# Altium PCB AC_Dimmer.PcbDoc
Units mm, origin at the board's own origin, x right, y up, seen from the top; angles counter-clockwise.
Board outline 44.83 x 29.59 mm, 2 copper layers (Top Layer, Bottom Layer); 17 components, 17 nets, 44 pads, 0 vias.
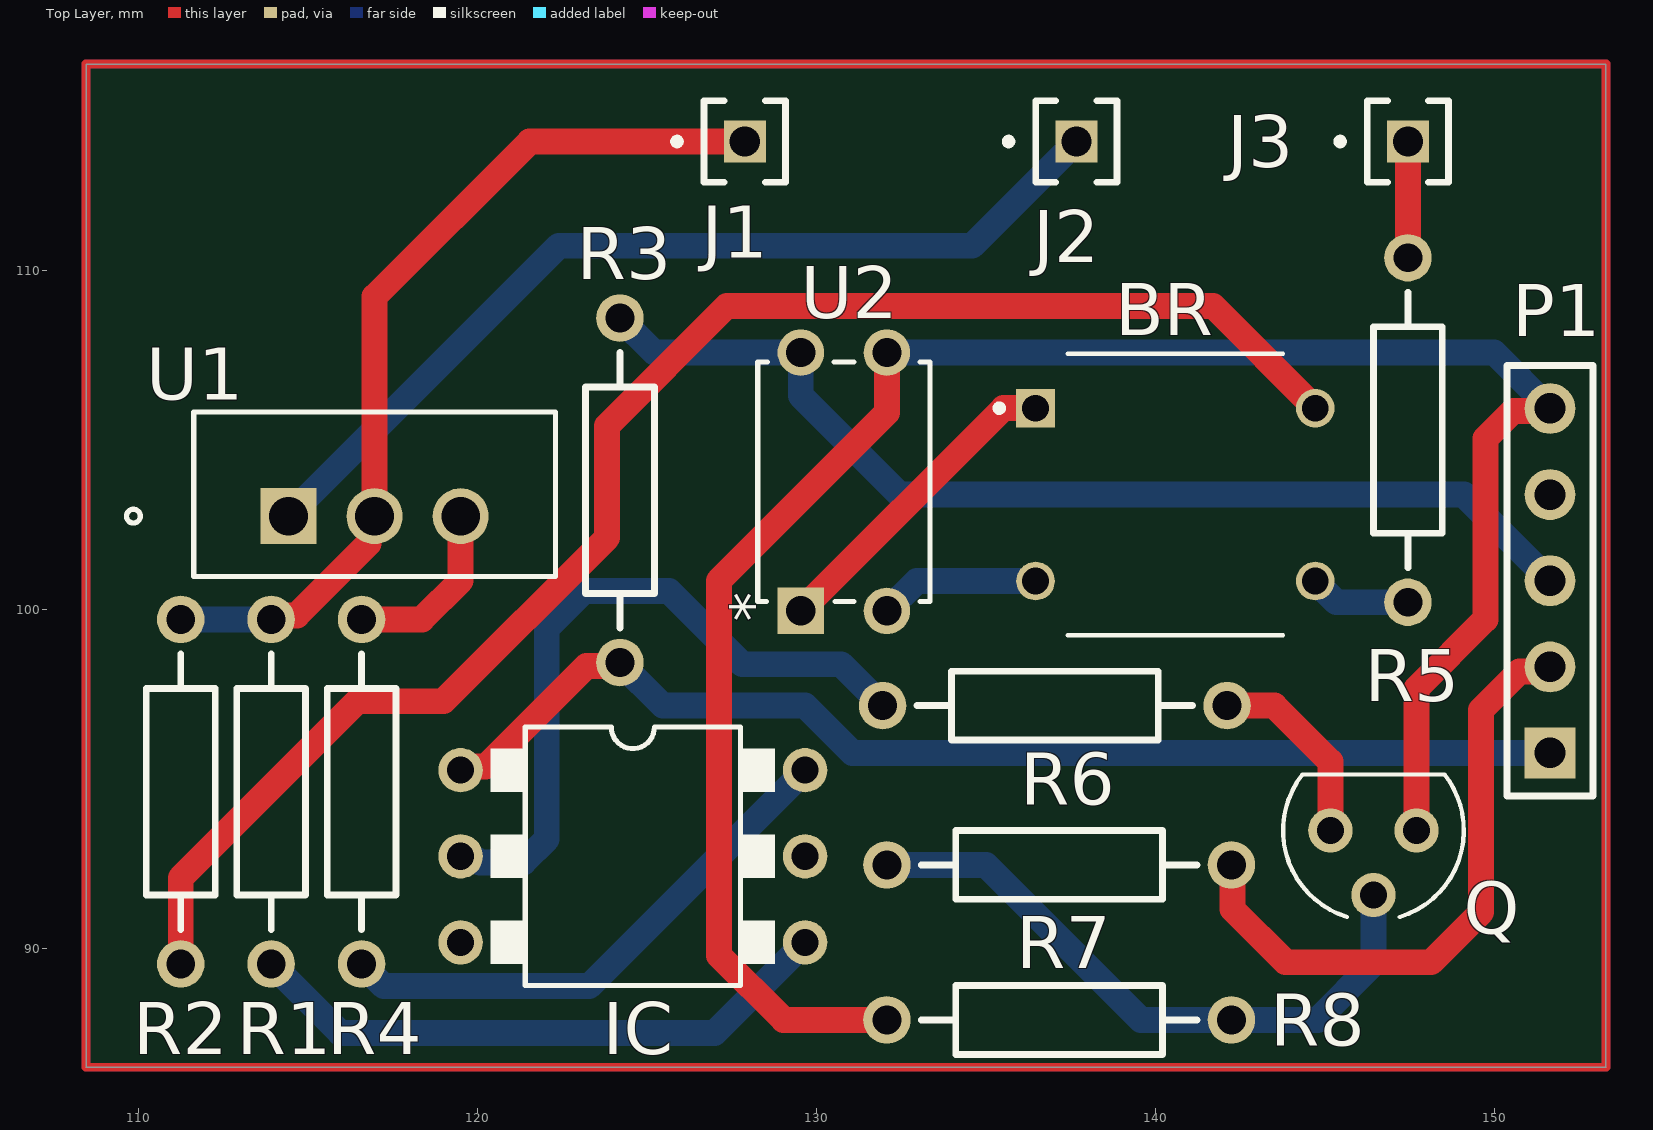
[diagram p0: Top Layer view]
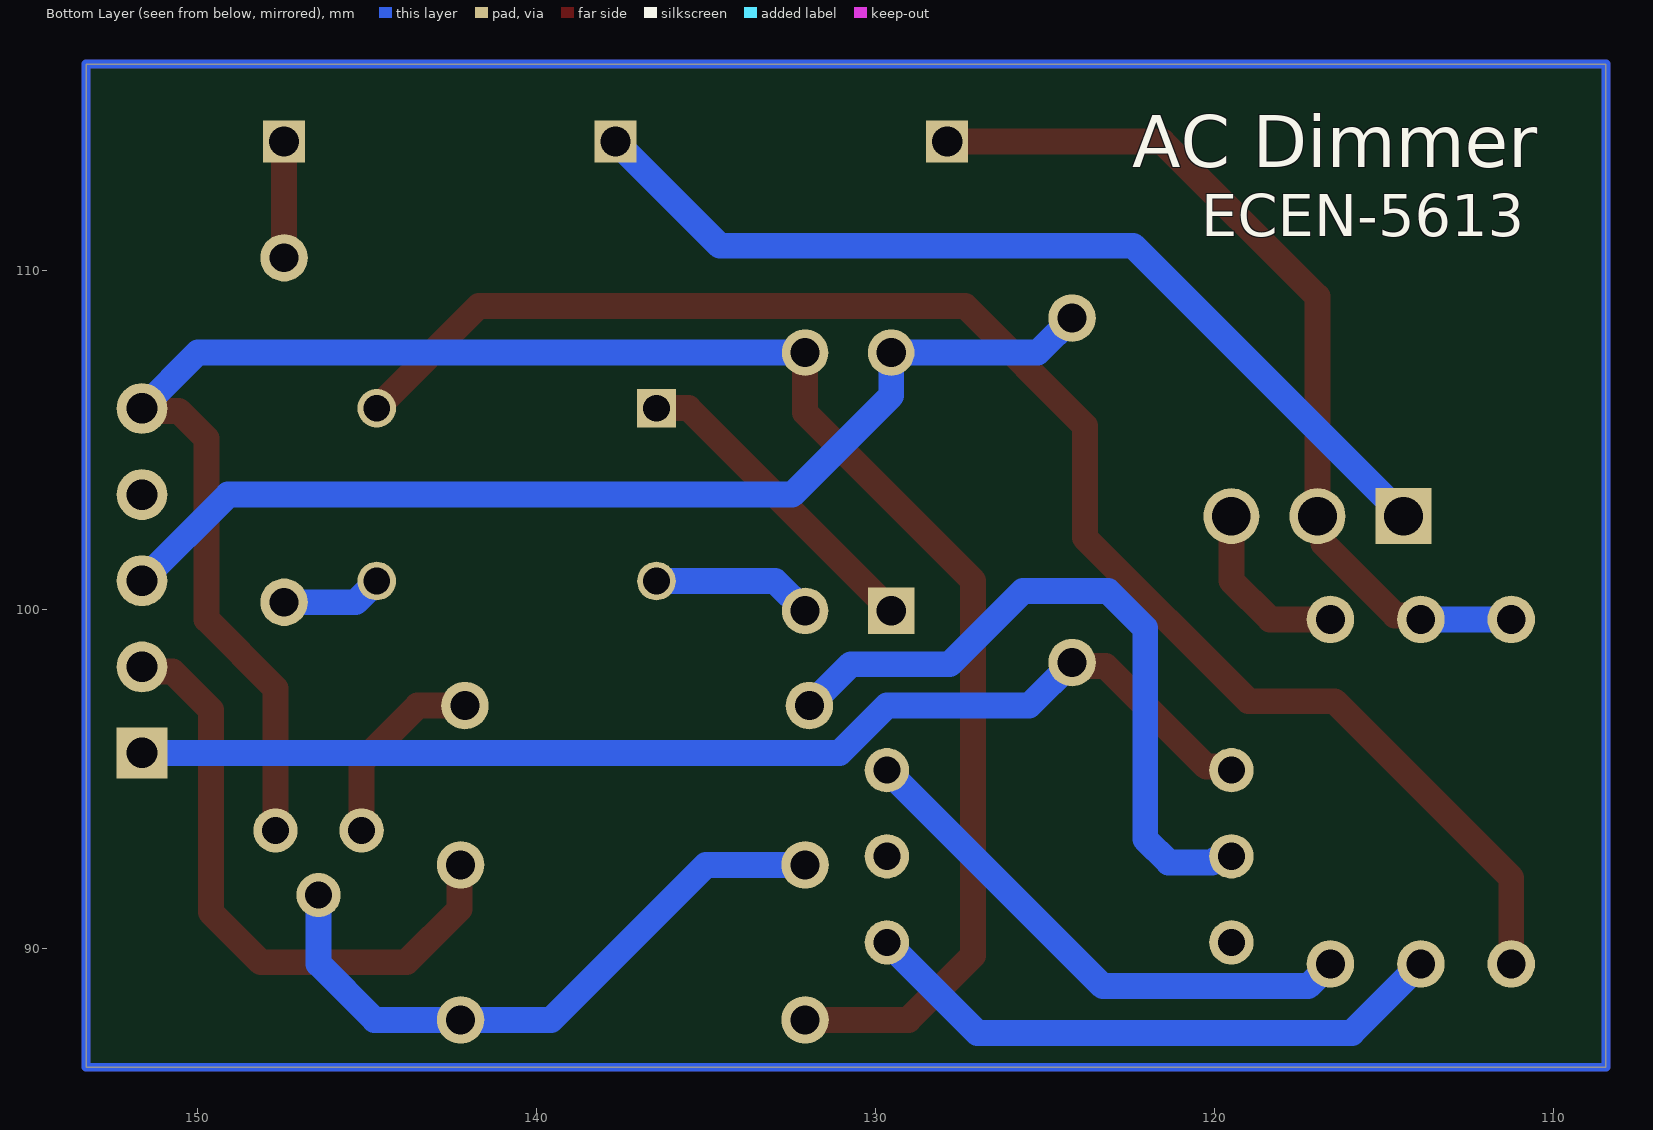
[diagram p1: Bottom Layer view, seen from below]

## Layer stack, top to bottom
Top Solder: solder mask 0.0102, Solder Resist, Dk 3.5
Top Layer: signal copper 0.0356
Dielectric 1: dielectric 0.32, FR-4, Dk 4.8
Bottom Layer: signal copper 0.0356
Bottom Solder: solder mask 0.0102, Solder Resist, Dk 3.5

## Board outline
108.458,86.487 108.458,116.078 153.289,116.078 153.289,86.487

## Design rules (kind name [scope] priority, off if disabled: settings)
Clearance [All] p1: gap=0.254 ignorepadtopadclearanceinfootprint=FALSE except(0: Arc-Hole Track-Hole SMDPad-Hole THPad-Hole Via-Hole Fill-Hole Poly-Hole Region-Hole Text-Hole)
PolygonConnect [All] p1: connectstyle=Relief reliefconductorwidth=0.254 reliefentries=4 polygonreliefangle="90 Angle" airgapwidth=0.254
RoutingVias [All] p1: holewidth=0.711 width=1.27 viastyle="Through Hole" minholewidth=0.711 minwidth=1.27 maxholewidth=0.711 maxwidth=1.27
SolderMaskExpansion [All] p1: expansion=0.102 istentingtop=FALSE
Width [All] p1: maxlimit=1 minlimit=0.508 preferedwidth=0.764 minimp=50.000000 maximp=50.000000 favimp=50.000000
30 further rules are at their usual default settings.

## Components (designator, comment, footprint, x,y, rotation, side; value= is the part's Value field where it differs from the comment)
BR "DB107" DIP825W50P509L880H320Q4 140.589,103.378 r0 top
IC "MOC3020" DIL06-A 124.587,92.71 r270 top
J1 "MTMM-101-07-T-S-230" SAMTEC_MTMM-101-07-T-S-230 127.889,113.792 r0 top
J2 "MTMM-101-07-T-S-230" SAMTEC_MTMM-101-07-T-S-230 137.668,113.792 r0 top
J3 "MTMM-101-07-T-S-230" SAMTEC_MTMM-101-07-T-S-230 147.447,113.792 r0 top
P1 "Header 5" HDR1X5 151.638,95.758 r90 top
Q "PN2222" TO92 146.431,93.472 r180 top
R1 "Res2" AXIAL-0.4 113.919,94.615 r270 top value=330Ohm
R2 "Res2" AXIAL-0.4 111.252,94.615 r270 top value=470k
R3 "Res2" AXIAL-0.4 124.206,103.505 r90 top value=10k
R4 "Res2" AXIAL-0.4 116.586,94.615 r270 top value=100Ohm
R5 "Res2" AXIAL-0.4 147.447,105.283 r270 top value=470k
R6 "Res2" AXIAL-0.4 137.033,97.155 r0 top value=220Ohm
R7 "Res2" AXIAL-0.4 137.16,92.456 r0 top value=1k
R8 "Res2" AXIAL-0.4 137.16,87.884 r180 top value=10k
U1 "BTA12-600BRG" TO-220AB_STM 114.427,102.743 r0 top
U2 "SFH610A-4" DIP-4_SFH610A_VIS 129.54,99.949 r90 top

## Footprints (in the part's own frame and the unit in brackets; to place one, negate y for a bottom-side part, rotate by r counter-clockwise, add the part's x,y. Pads: shape width x height; smd on the part's side, far side on the other; paste and mask are expansions set on the pad)
AXIAL-0.4 [mm] "Axial Device, Thru-Hole; 2 Leads; 0.4 in Pin Spacing"
  round 1.4 hole 0.85: 1(-5.08,0) 2(5.08,0)
  silkscreen extent -4.06,-1.02 4.06,1.02
DIL06-A [mm]
  round 1.308 hole 0.8: 1(-2.54,-5.08) 2(0,-5.08) 3(2.54,-5.08) 4(2.54,5.08) 5(0,5.08) 6(-2.54,5.08)
  silkscreen extent -3.81,-4.19 3.81,4.19
DIP825W50P509L880H320Q4 [mm]
  rect 1.14x1.14 hole 0.79: 1(-4.125,2.55)
  round 1.14 hole 0.79: 2(-4.125,-2.55) 3(4.125,-2.55) 4(4.125,2.55)
  silkscreen extent -5.29,-4.15 3.17,4.15
DIP-4_SFH610A_VIS [mil]
  rect 54x54 hole 34 mask+0: 1(0,0)
  round 54 hole 34 mask+0: 2(0,-100) 3(300,-100) 4(300,0)
  silkscreen extent 11,-150 289,50, body extent -5,-145 315,45, height 190
HDR1X5 [mm] "Connector; Header; 5 Position"
  rect 1.5x1.5 hole 0.9: 1(0,0)
  round 1.5 hole 0.9: 2(2.54,0) 3(5.08,0) 4(7.62,0) 5(10.16,0)
  silkscreen extent -1.27,-1.27 11.43,1.27
SAMTEC_MTMM-101-07-T-S-230 [mm]
  rect 1.24x1.24 hole 0.89: 01(0,0)
  silkscreen extent -2.1,-1.2 1.2,1.2
TO92 [mm]
  round 1.308 hole 0.8: 1(-1.27,0) 2(0,1.905) 3(1.27,0)
  silkscreen extent -2.67,-1.65 2.66,2.55
TO-220AB_STM [mil]
  rect 65x65 hole 45: 1(0,0)
  round 65 hole 45: 2(100,0) 3(200,0)
  silkscreen extent -188,-70 310,121, body extent -105,-65 305,116, height 772

## Part data
BR: "Bridge Rectifier Single Phase Standard 1kV Surface Mount DB-S", Package="EDIP-4 EIC Semiconductor", Availability=Warning, Check_prices=https://www.snapeda.com/parts/DB107/EIC%20Semiconductor/view-part/4479936/?ref=eda, MF="EIC Semiconductor", Mouser-Purchase-URL=https://snapeda.com/shop?store=Mouser&id=4479936, MP=DB107, Price=None, SnapEDA_Link=https://www.snapeda.com/parts/DB107/EIC%20Semiconductor/view-part/4479936/?ref=snap
IC: "Optoisolator Triac Output 5300Vrms 1 Channel 6-DIP", Package="DIP-6 ON Semiconductor", Availability=Unavailable, MF="ON Semiconductor", MP=MOC3020, Price=None, SnapEDA_Link=https://www.snapeda.com/parts/MOC3020/ON%20Semiconductor/view-part/2780094/?ref=snap
J1 J2 J3: Package=None, Availability=Unavailable, MP=MTMM-101-07-T-S-230, Price=None
P1: "Header, 5-Pin", LatestRevisionDate=17-Jul-2002, LatestRevisionNote="Re-released for DXP Platform.", Publisher="Altium Limited"
Q: "Bipolar (BJT) Transistor NPN 40V 1A 300MHz 625mW Through Hole TO-92-3", Package="TO-226-3 National Semiconductor", Availability=Unavailable, MF="ON Semiconductor", MP=PN2222, Price=None, SnapEDA_Link=https://www.snapeda.com/parts/PN2222/ON%20Semiconductor/view-part/587161/?ref=snap
R1 R2 R3 R4 R5 R6 R7 R8: "Resistor", LatestRevisionDate=17-Jul-2002, LatestRevisionNote="Re-released for DXP Platform.", PackageDescription="Axial Device, Thru-Hole; 2 Leads; 0.4 in Pin Spacing", PackageReference=AXIAL-0.4, Published=8-Jun-2000, Publisher="Altium Limited"
U1: "No Description Available", Mfr_Name=STMicroelectronics, Copyright="Copyright (C) 2022 Ultra Librarian. All rights reserved.", Manufacturer_Part_Number=BTA12-600BRG, RefDes=RefDes, Type=DEV
U2: "No Description Available", Mfr_Name=Vishay, Copyright="Copyright (C) 2022 Ultra Librarian. All rights reserved.", Manufacturer_Part_Number=SFH610A-4, RefDes=RefDes, Type=DEV

## Nets (pads, with @x,y where several pads share a name; then routed paths per layer and width w, separated by ;. In a path a pad name is that pad's centre, name@x,y a point inside that pad or via, vN(x,y) a via of type N, cw(c..) or ccw(c..) an arc to the next point about the centre after c; other vN are vias at no path point)
3.3V: IC.1 P1.1 R3.1 | length 34.6
  Top Layer w0.764: IC.1 119.611,95.354 120.246,95.354 123.22,98.328 124.109,98.328 R3.1
  Bottom Layer w0.764: R3.1 125.476,97.155 129.667,97.155 131.064,95.758 P1.1
GND: P1.5 Q.1 R8.2 U2.3 | length 60.5
  Top Layer w0.764: R8.2 129.032,87.884 127.127,89.789 127.127,100.838 132.08,105.791 U2.3 ; Q.1 147.701,97.663 149.733,99.695 149.733,105.029 150.553,105.849 151.569,105.849 P1.5
  Bottom Layer w0.764: U2.3 149.987,107.569 P1.5
NetBR_1: BR.1 U2.1 | length 9.4
  Top Layer w0.764: U2.1 135.519,105.928 BR.1
NetBR_2: BR.2 U2.2 | length 4.7
  Bottom Layer w0.764: U2.2 132.959,100.828 BR.2
NetBR_3: BR.3 R5.2 | length 3
  Bottom Layer w0.764: BR.3 145.339,100.203 R5.2
NetBR_4: BR.4 R2.2 | length 46.2
  Top Layer w0.764: R2.2 111.252,92.075 116.459,97.282 118.999,97.282 123.825,102.108 123.825,105.41 127.356,108.941 141.701,108.941 BR.4
NetIC_2: IC.2 R6.1 | length 20.9
  Bottom Layer w0.764: IC.2 119.611,92.606 119.996,92.606 120.074,92.528 121.357,92.528 122.047,93.218 122.047,99.441 123.139,100.533 125.654,100.533 127.814,98.373 130.735,98.373 R6.1
NetIC_4: IC.4 R1.2 | length 17.7
  Bottom Layer w0.764: R1.2 115.951,87.503 127,87.503 IC.4
NetIC_6: IC.6 R4.2 | length 16
  Bottom Layer w0.764: R4.2 117.241,88.88 123.297,88.88 IC.6
NetQ_2: Q.2 R7.1 R8.1 | length 19
  Bottom Layer w0.764: R7.1 135.001,92.456 139.573,87.884 R8.1 144.78,87.884 146.431,89.535 Q.2
NetQ_3: Q.3 R6.2 | length 5.8
  Top Layer w0.764: R6.2 143.51,97.155 145.161,95.504 Q.3
NetR4_1: R4.1 U1.3 | length 5.3
  Top Layer w0.764: R4.1 118.364,99.695 119.507,100.838 U1.3
Neutral: J3.01 R5.1 | length 3.4
  Top Layer w0.764: R5.1 J3.01
Opto_PWM: P1.2 R7.2 | length 18.4
  Top Layer w0.764: R7.2 142.273,92.423 142.273,91.153 143.84,89.586 148.133,89.586 149.606,91.059 149.606,97.028 150.735,98.157 151.497,98.157 P1.2
Phase_IN: J1.01 R1.1 R2.1 U1.2 | length 26.7
  Top Layer w0.764: R1.1 114.041,99.817 114.676,99.817 116.797,101.938 116.797,102.573 U1.2 ; U1.2@116.967,102.733 116.967,109.22 121.539,113.792 J1.01
  Bottom Layer w0.764: R2.1 R1.1
Phase_OUT: J2.01 U1.1 | length 27.8
  Bottom Layer w0.764: U1.1 122.403,110.719 134.595,110.719 J2.01
ZCR: P1.3 R3.2 U2.4 | length 31.4
  Bottom Layer w0.764: R3.2 125.222,107.569 U2.4 129.54,106.299 132.461,103.378 149.098,103.378 P1.3
pads on no net: IC.3 IC.5 P1.4

## Other copper
Multi-Layer:
  lines w0.254: 108.458,86.487 108.458,112.84 108.458,114.427 108.458,114.681 108.458,116.078 153.289,116.078 153.289,86.487 108.458,86.487

## Silkscreen, mask and mechanical layers (free items; w line width, h text height)
Bottom Overlay:
  text "AC Dimmer" at 122.428,113.03 h1.52
  text "ECEN-5613" at 120.396,110.998 h1.24

## Dimensions
153.289,116.078 to 153.289,86.487 on Top Overlay
108.458,116.078 to 153.289,116.078 on Top Overlay

## Text inside footprints (layer, text, board x,y; h text height)
U2: Top Overlay "*" at 128.727,99.632 h1.27 r90; Mechanical 13 "*" at 130.175,100.292 h1.27 r90